# Altium PCB PCB.PcbDoc
Units mm, origin at the board's own origin, x right, y up, seen from the top; angles counter-clockwise.
Board outline 70 x 50 mm, 2 copper layers (Top Layer, Bottom Layer); 51 components, 33 nets, 179 pads, 25 vias.
Unrouted connection lines stored in the file: 2.
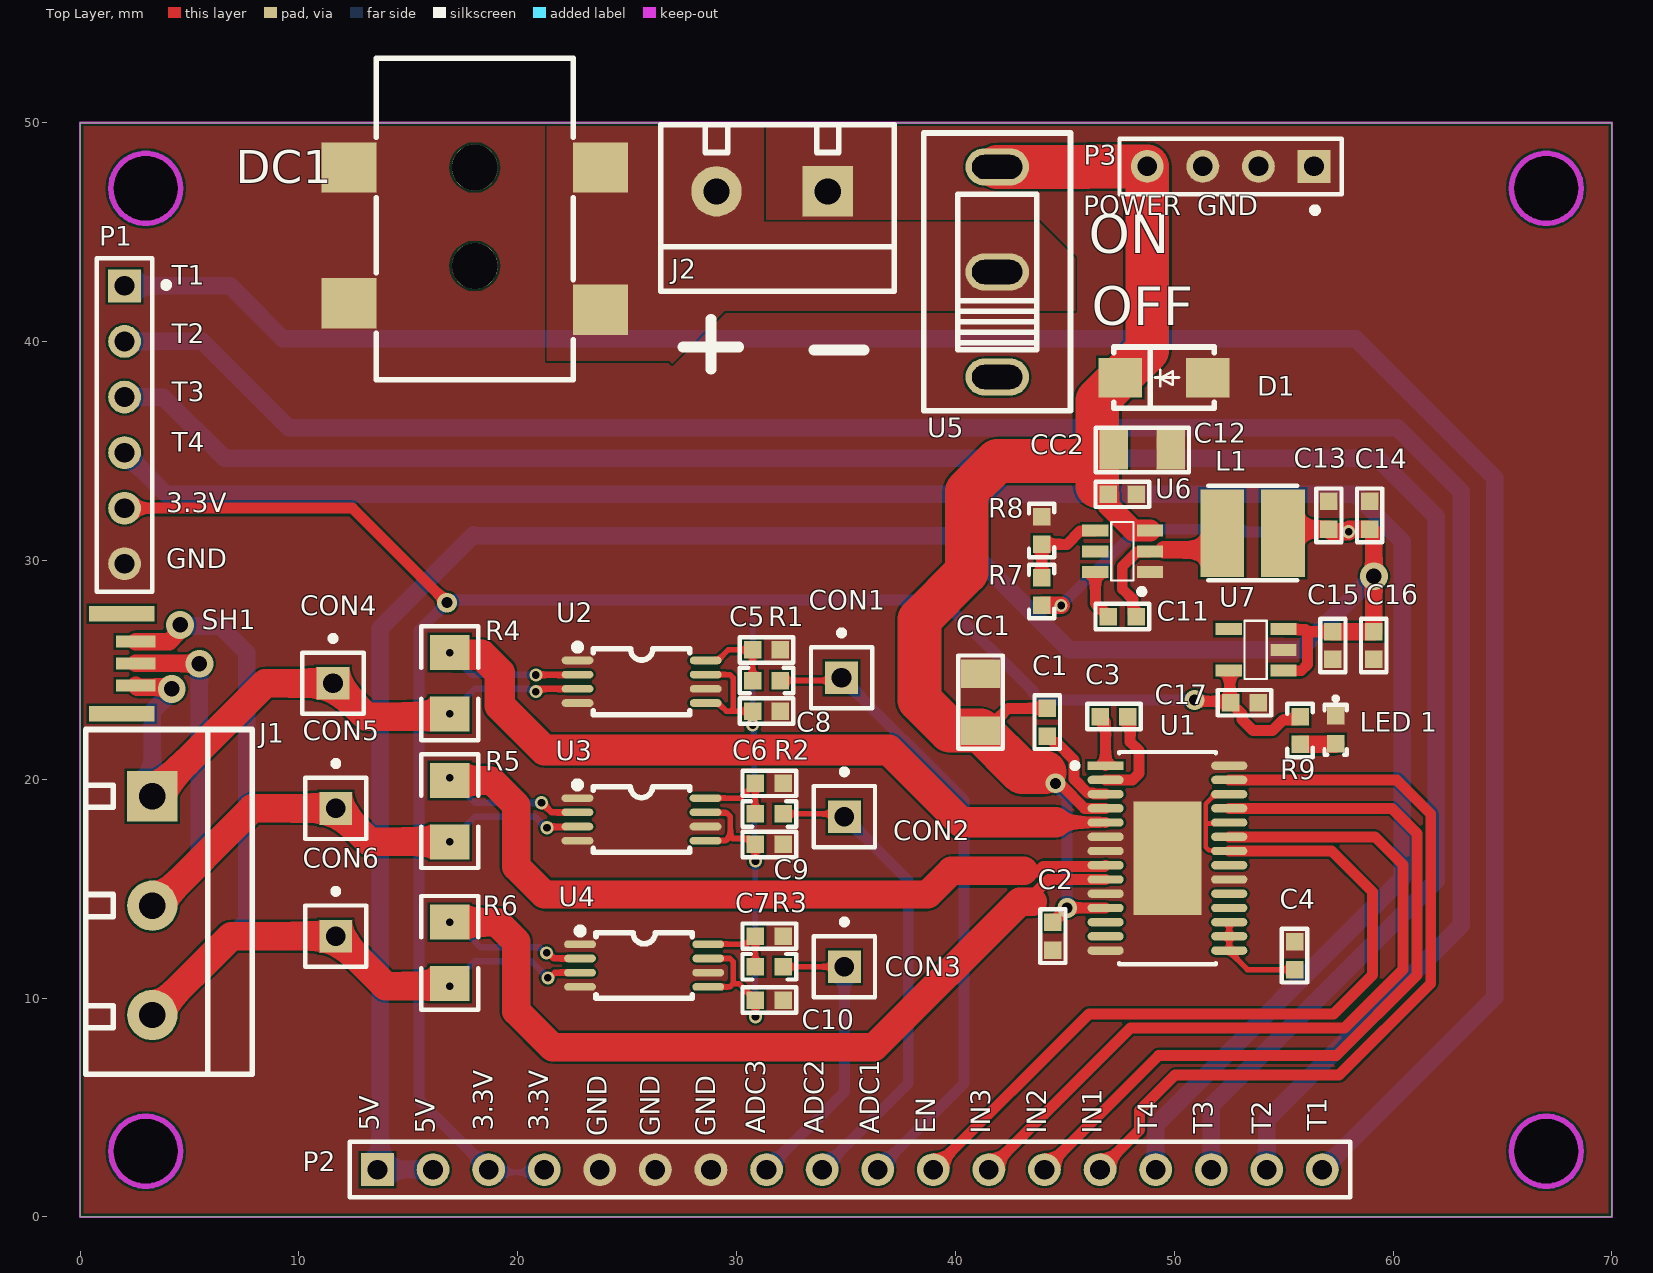
[diagram p0: Top Layer view]
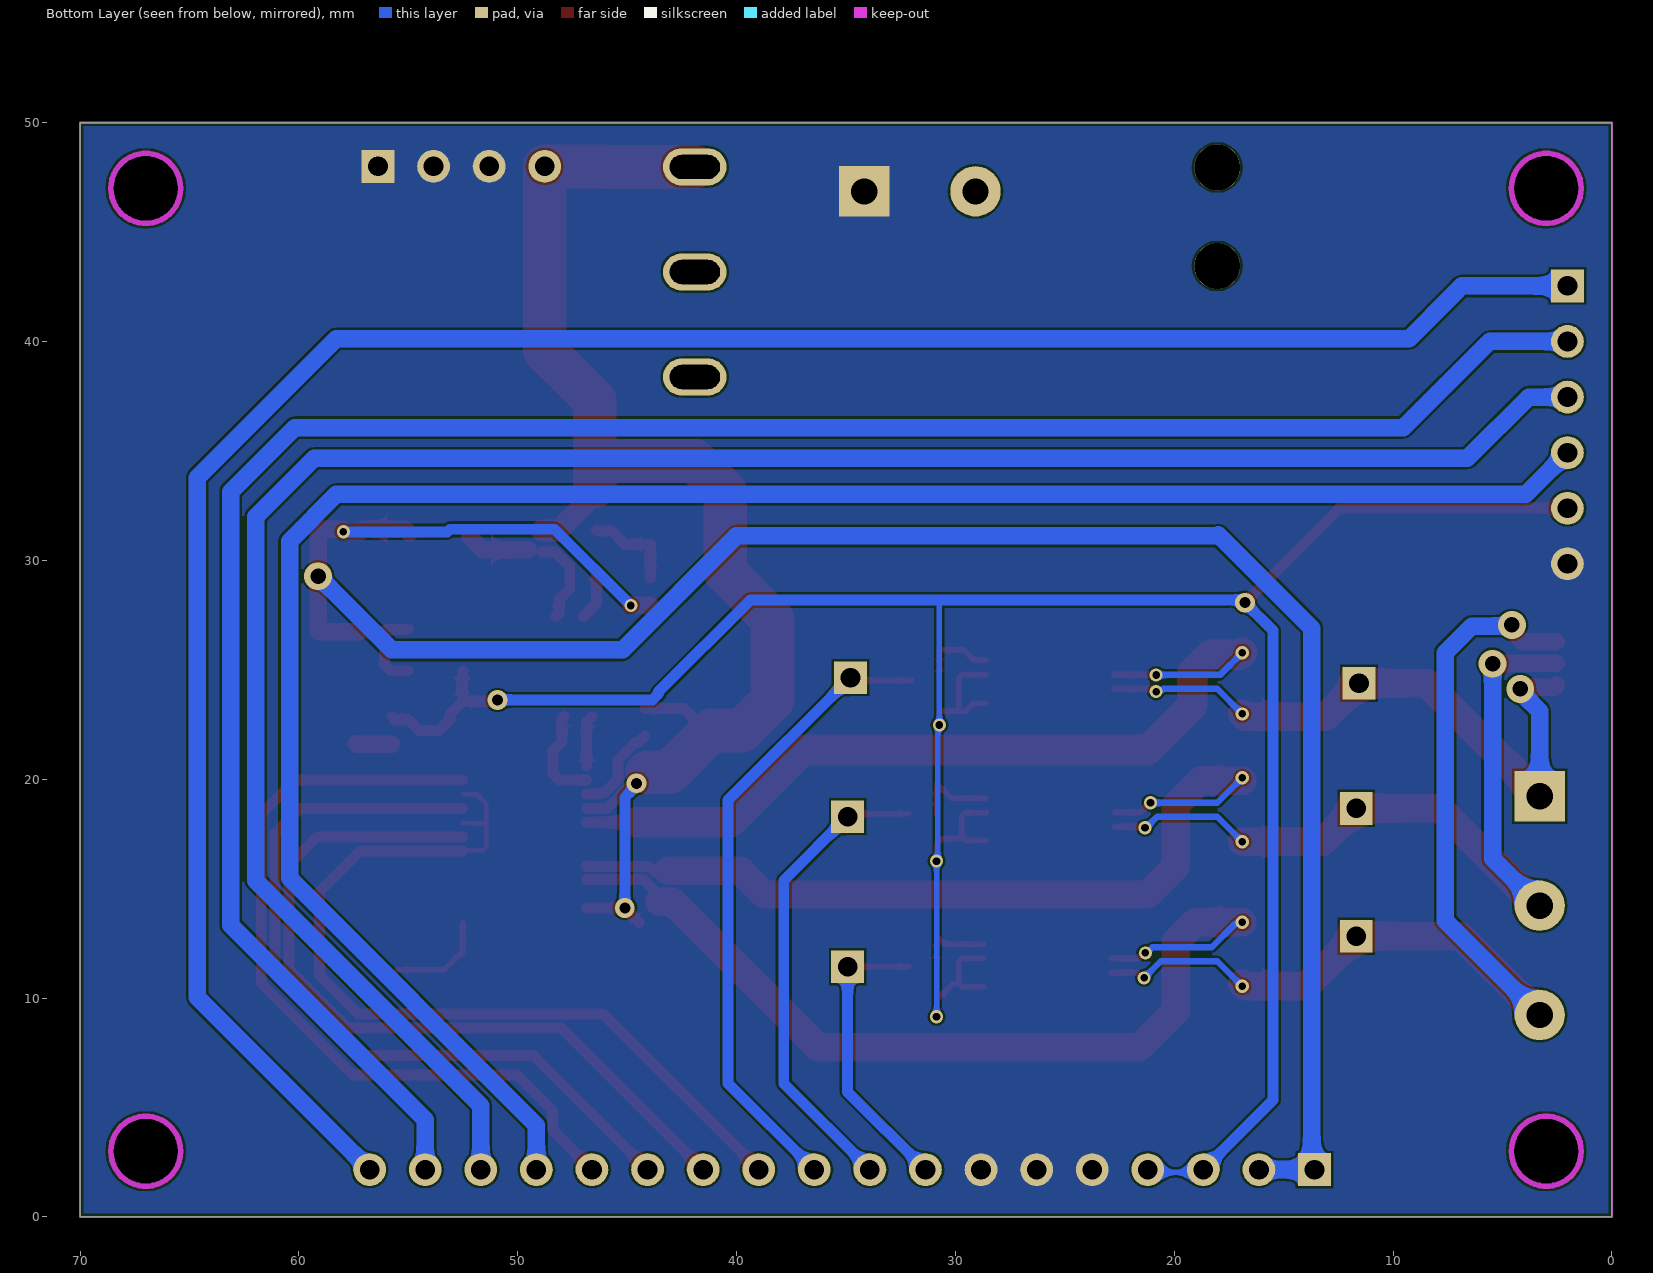
[diagram p1: Bottom Layer view, seen from below]

## Layer stack, top to bottom
Top Solder: solder mask 0.0102, Solder Resist, Dk 3.5
Top Layer: signal copper 0.0356
Dielectric 1: dielectric 0.32, FR-4, Dk 4.8
Bottom Layer: signal copper 0.0356
Bottom Solder: solder mask 0.0102, Solder Resist, Dk 3.5

## Board outline
0,0 0,50 70,50 70,0
cut-out: 65.4,3 ccw(c67,3) 67,1.4 ccw(c67,3) 68.6,3 ccw(c67,3) 67,4.6 ccw(c67,3)
cut-out: 65.4,47 ccw(c67,47) 67,45.4 ccw(c67,47) 68.6,47 ccw(c67,47) 67,48.6 ccw(c67,47)
cut-out: 3,45.4 cw(c3,47) 1.4,47 cw(c3,47) 3,48.6 cw(c3,47) 4.6,47 cw(c3,47)
cut-out: 1.4,3 ccw(c3,3) 3,1.4 ccw(c3,3) 4.6,3 ccw(c3,3) 3,4.6 ccw(c3,3)

## Design rules (kind name [scope] priority, off if disabled: settings)
Clearance [All] p1: gap=0.1 ignorepadtopadclearanceinfootprint=FALSE except(0: Arc-Hole Track-Hole SMDPad-Hole THPad-Hole Via-Hole Fill-Hole Poly-Hole Region-Hole Text-Hole; 0.102: Arc-Arc Arc-Track Arc-SMDPad Arc-THPad Track-Track Track-SMDPad Track-THPad SMDPad-SMDPad SMDPad-THPad THPad-THPad; 0.127: Arc-Via Track-Via SMDPad-Via SMDPad-Text THPad-Via Via-Via; 0.254: Arc-Text Track-Text THPad-Text Via-Text Fill-Text Poly-Text Region-Text Text-Text)
HoleSize [All] p1: absolutevalues=TRUE maxlimit=30 minlimit=0.025 maxpercent=80.000 minpercent=20.000
HoleToHoleClearance [All] p1: gap=0.152 allowstackedmicrovias=TRUE
MinimumSolderMaskSliver [All] p1: minsoldermaskwidth=0
PlaneClearance [All] p1: clearance=0.254
PlaneConnect [All] p1: planeconnectstyle=Direct reliefexpansion=0.508 reliefentries=4 reliefconductorwidth=0.254 reliefairgap=0.254
PolygonConnect [All] p1: connectstyle=Direct reliefconductorwidth=0.254 reliefentries=4 polygonreliefangle="90 Angle" airgapwidth=0.254
RoutingVias [All] p1: holewidth=0.711 width=1.27 viastyle="Through Hole" minholewidth=0.3 minwidth=0.5 maxholewidth=30 maxwidth=30
SilkToSilkClearance [All] p1: silktosilkclearance=0
SilkToSolderMaskClearance [IsPad] p1: minsilkscreentomaskgap=0 clearancetoexposedcopper=TRUE
SolderMaskExpansion [All] p1: expansion=0.102 istentingtop=FALSE
Width [All] p1: maxlimit=3 minlimit=0.1 preferedwidth=0.254
23 further rules are at their usual default settings.

## Classes and differential pairs
component class Sheet2-power: C11 C12 C13 C14 C15 C16 C17 CC2 D1 DC1 J2 L1 "LED 1" P3 R7 R8 R9 U5 U6 U7
component class Sheet1-driver: C1 C2 C3 C4 C5 C6 C7 C8 C9 C10 CC1 CON1 CON2 CON3 CON4 CON5 CON6 J1 P1 P2 R1 R2 R3 R4 R5 R6 SH1 U1 U2 U3 U4

## Components (designator, comment, footprint, x,y, rotation, side; value= is the part's Value field where it differs from the comment)
C1 "100nF" CC1608-0603 44.196,22.606 r90 top
C2 "100NF 50V" CC1608-0603 44.45,12.827 r270 top
C3 "0.01uF" CC1608-0603 47.244,22.86 r180 top
C4 "0.47UF" CC1608-0603 55.499,11.938 r90 top
C5 "2.2nF" CC1608-0603 31.369,25.908 r180 top
C6 "2.2nF" CC1608-0603 31.496,19.812 r180 top
C7 "2.2nF" CC1608-0603 31.496,12.827 r180 top
C8 "100nF" CC1608-0603 31.369,23.114 r180 top
C9 "100nF" CC1608-0603 31.496,17.018 r180 top
C10 "100nF" CC1608-0603 31.496,9.906 r180 top
C11 "100nF" CC1608-0603 47.625,27.432 r0 top
C12 "100NF 50V" CC1608-0603 47.625,33.02 r180 top
C13 "22uf" CC1608-0603 57.064,32.059 r270 top
C14 "22uf" CC1608-0603 58.933,32.059 r270 top
C15 "2.2uf" CC1608-0603 57.247,26.107 r90 top
C16 "100nF" CC1608-0603 59.116,26.107 r90 top
C17 "10uF" CC1608-0603 53.213,23.495 r0 top
CC1 "Cap Chip 1206" CC3216-1206 41.148,23.558 r270 top value="10UF 50V"
CC2 "Cap Chip 1206" CC3216-1206 48.578,35.052 r180 top value="10UF 50V"
CON1 "COAX-OUT" PIN1 34.798,24.638 r0 top
CON2 "COAX-OUT" PIN1 34.925,18.288 r0 top
CON3 "COAX-OUT" PIN1 34.925,11.43 r0 top
CON4 "COAX-OUT" PIN1 11.557,24.384 r0 top
CON5 "COAX-OUT" PIN1 11.684,18.669 r0 top
CON6 "COAX-OUT" PIN1 11.684,12.827 r0 top
D1 "SMBJ24A" "DO-214 AA" 49.53,38.354 r0 top
DC1 "DC-2.1" DC-IN-SMD_DC-050-25A 18.034,44.704 r0 top
J1 "HDR-1X3" KF301-5.0-3P 3.302,14.224 r270 top
J2 "HDR-1X3" KF301-5.0-2P 29.083,46.863 r180 top
L1 "15uH" Inductor-4018 53.594,31.242 r0 top
"LED 1" "LED 0603" "LED 0603" 57.377,22.266 r90 top
P1 "Header 6" HDR1X6 2.032,42.545 r270 top
P2 "Header 18" HDR1X18 13.589,2.159 r0 top
P3 "Header 4" HDR1X4 56.388,48.006 r180 top
R1 "168R" CR1608-0603 31.369,24.511 r180 top
R2 "168R" CR1608-0603 31.496,18.415 r180 top
R3 "168R" CR1608-0603 31.496,11.43 r180 top
R4 "10R" CR3216-1206 16.891,24.384 r90 top
R5 "10R" CR3216-1206 16.891,18.542 r90 top
R6 "10R" CR3216-1206 16.891,12.065 r90 top
R7 "100K 1%" CR1608-0603 43.942,28.575 r270 top
R8 "13.3K 1%" CR1608-0603 43.942,31.369 r270 top
R9 "2K" CR1608-0603 55.753,22.225 r270 top
SH1 "SH1.0-3P" SH1.0-3P 2.54,26.289 r270 top
U1 "DRV8313PWPR" HTSSOP-28 49.688,16.394 r0 top
U2 "INA240A1PWR" TSSOP-8 25.66,24.455 r270 top
U3 "INA240A1PWR" TSSOP-8 25.654,18.161 r270 top
U4 "INA240A1PWR" TSSOP-8 25.775,11.486 r270 top
U5 "HX SS12D10G4" SS12D10-G4 41.91,43.18 r90 top
U6 "TPS54202DDCR" SOT23-6 47.625,30.353 r90 top
U7 "SPX3819M5-L-3.3/TR" SOT23-5 54.991,26.863 r270 top

## Footprints (in the part's own frame and the unit in brackets; to place one, negate y for a bottom-side part, rotate by r counter-clockwise, add the part's x,y. Pads: shape width x height; smd on the part's side, far side on the other; paste and mask are expansions set on the pad)
CC1608-0603 [mm]
  rect 0.8x0.8 smd: 1(-0.635,0) 2(0.635,0)
  silkscreen extent -1.23,-0.58 1.23,0.58, body extent -0.8,-0.4 0.8,0.4, height 0.3
CC3216-1206 [mm]
  rect 1.3x1.8 smd: 1(-1.27,0) 2(1.333,0)
  silkscreen extent -2.1,-1.02 2.16,1.02, body extent -1.59,-0.85 1.61,0.85, height 1.76
CR1608-0603 [mm]
  rect 0.8x0.8 smd: 1(-0.635,0) 2(0.635,0)
  silkscreen extent -1.23,-0.58 1.23,0.58, body extent -0.8,-0.4 0.8,0.4, height 0.45
CR3216-1206 [mm]
  rect 1.6x1.8 smd: 1(-1.4,0) 2(1.4,0)
  silkscreen extent -2.6,-1.3 2.6,1.3, body extent -1.6,-0.8 1.6,0.8, height 0.6
DC-IN-SMD_DC-050-25A [mm]
  rect 2.5x2.3 smd: 1(5.75,-3.25) 1(5.75,3.25) 2(-5.75,3.25) 3(-5.75,-2.95)
  round 2.1 hole 2.1 unplated: ""(0,-1.25) ""(0,3.25)
  silkscreen extent -4.5,-6.45 4.5,8.25, body extent -6.28,-6.57 6.28,8.13, height 10.94
"DO-214 AA" [mm] "SMB"
  rect 2x1.8 smd: 1(-2,0) 2(2,0)
  silkscreen extent -2.3,-1.4 2.3,1.4, body extent -2.83,-1.8 2.57,1.8, height 2.4
HDR1X4 [mm] "Connector; Header; 4 Position"
  rect 1.5x1.5 hole 0.9: 1(0,0)
  round 1.5 hole 0.9: 2(2.54,0) 3(5.08,0) 4(7.62,0)
  silkscreen extent -1.27,-1.27 8.89,2.14, body extent -1.27,-1.27 8.89,1.27, height 8.54
HDR1X6 [mm] "Connector; Header; 6 Position"
  rect 1.5x1.5 hole 0.9: 1(0,0)
  round 1.5 hole 0.9: 2(2.54,0) 3(5.08,0) 4(7.62,0) 5(10.16,0) 6(12.7,0)
  silkscreen extent -1.27,-1.27 13.97,2.04, body extent -1.27,-1.27 13.97,1.27, height 8.54
HDR1X18 [mm] "Connector; Header; 18 Position"
  rect 1.5x1.5 hole 0.9: 1(0,0)
  round 1.5 hole 0.9: 2(2.54,0) 3(5.08,0) 4(7.62,0) 5(10.16,0) 6(12.7,0) 7(15.24,0) 8(17.78,0) 9(20.32,0) 10(22.86,0) 11(25.4,0) 12(27.94,0) 13(30.48,0) 14(33.02,0) 15(35.56,0) 16(38.1,0) 17(40.64,0) 18(43.18,0)
  silkscreen extent -1.27,-1.27 44.45,1.27
HTSSOP-28 [mm]
  rect 1.655x0.381 smd paste+0 mask+0: 1(-2.825,4.225)
  rrect100% 1.655x0.381 smd paste+0 mask+0: 2(-2.825,3.575) 3(-2.825,2.925) 4(-2.825,2.275) 5(-2.825,1.625) 6(-2.825,0.975) 7(-2.825,0.325) 8(-2.825,-0.325) 9(-2.825,-0.975) 10(-2.825,-1.625) 11(-2.825,-2.275) 12(-2.825,-2.925) 13(-2.825,-3.575) 14(-2.825,-4.225) 15(2.825,-4.225) 16(2.825,-3.575) 17(2.825,-2.925) 18(2.825,-2.275) 19(2.825,-1.625) 20(2.825,-0.975) 21(2.825,-0.325) 22(2.825,0.325) 23(2.825,0.975) 24(2.825,1.625) 25(2.825,2.275) 26(2.825,2.925) 27(2.825,3.575) 28(2.825,4.225)
  rect 3.1x5.18 smd paste-1000 mask+0: 29(0,0)
  silkscreen extent -4.35,-4.85 2.2,4.85, body extent -3.9,-5.1 3.9,5.1, height 0.25
Inductor-4018 [mm]
  rect 2x4 smd paste+0 mask+0.051: 1(-1.397,0) 2(1.373,0)
  silkscreen extent -2.03,-2.16 2.03,2.16, body extent -2,-2 2,2, height 1.8
KF301-5.0-2P [mm] "可拼接端子/6A"
  rect 2.3x2.3 hole 1.2: 1(-5.08,0)
  round 2.3 hole 1.2: 2(0,0)
  silkscreen extent -8.13,-3.05 2.54,4.57, body extent -7.95,-3 2.55,4.6, height 10.05
KF301-5.0-3P [mm] "可拼接端子/6A"
  rect 2.3x2.3 hole 1.2: 1(-5,0)
  round 2.3 hole 1.2: 2(0,0) 3(5,0)
  silkscreen extent -8.05,-3.05 7.7,4.57, body extent -7.87,-3 7.63,4.6, height 10.05
"LED 0603" [mm]
  rect 0.8x0.8 smd: 1(-0.635,0) 2(0.635,0)
  silkscreen extent -1.14,-0.51 1.48,0.51, body extent -0.8,-0.4 0.8,0.4, height 0.6
PIN1 [mm] "Connector; Coax-F"
  rect 1.5x1.5 hole 0.9: 1(0,0)
  silkscreen extent -1.4,-1.4 1.4,2.17, body extent -1.27,-1.27 1.27,1.27, height 8.54
SH1.0-3P [mm]
  rect 0.7x3 smd: 0(-1.27,-0.635) 0(3.3,-0.635)
  rect 0.55x1.8 smd: 1(0,0) 2(1,0) 3(2,0)
  body extent -1.49,-2.29 3.56,0.55, height 3
SOT23-5 [mm] "适用于MIC5205"
  rect 0.55x1.2 smd: 1(1.905,0) 2(0.955,0) 3(0.005,0) 4(0.005,-2.5) 5(1.905,-2.5)
  silkscreen extent -0.38,-1.78 2.29,-0.76, body extent -0.6,-2.82 2.5,0.38, height 1.45
SOT23-6 [mm]
  rect 0.55x1.2 smd: 1(-0.889,-1.27) 2(0.061,-1.27) 3(1.011,-1.27) 4(1.011,1.23) 5(0.061,1.23) 6(-0.889,1.23)
  silkscreen extent -1.9,-1.02 1.4,0.51, body extent -1.39,-1.4 1.51,1.4, height 1.45
SS12D10-G4 [mm]
  oval 1.7x2.9 hole 1.1 slot 2.3 at 90 deg: 1(-4.8,0) 2(0,0) 3(4.8,0)
  silkscreen extent -6.35,-3.35 6.35,3.35, body extent -6.32,-3.25 6.3,3.25, height 9.3
TSSOP-8 [mm]
  oval 0.353x1.454 smd: 1(-0.975,-2.927) 2(-0.325,-2.927) 3(0.325,-2.927) 4(0.975,-2.927) 5(0.975,2.927) 6(0.325,2.927) 7(-0.325,2.927) 8(-0.975,2.927)
  silkscreen extent -1.73,-3.08 1.5,2.2, body extent -1.43,-3.17 1.57,3.11, height 1.09

## Part data
C1 C2 C3 C4 C5 C6 C7 C8 C9 C10 C11 C12 C13 C14 C15 C16: library part "Cap Chip 0603", "0603封装的电容", Published=8-Jun-2000, Publisher="Altium Limited", Revision="July-2002: Re-released for DXP Platform."
C17: library part "Chip capacitor", "贴片电容"
CC1 CC2: "Polarized Capacitor (Radial)", Published=8-Jun-2000, Publisher="Altium Limited", Revision="July-2002: Re-released for DXP Platform."
CON1 CON2 CON3 CON4 CON5 CON6: "Coax-M Connector", Publisher="Altium Limited", Revision="17-Jul-2002: Re-released for DXP Platform."
D1: library part SMBJ18A, "TVS稳压二极管"
DC1: library part DC-050, "DC贴片插座", BOM_JLCPCB Part Class="Extended Part", BOM_Manufacturer=韩国韩荣, BOM_Manufacturer Part=DC-050-25A, BOM_Supplier=LCSC, BOM_Supplier Part=C707275, Contributor=LCSC, spicePre=D, spiceSymbolName=DC-050-25A
J1: library part "KF301 3P", "3P拧螺丝插件", BOM名称=3P接插件, 学习资源=https://shop463601444.taobao.com, 版权归属="封装库来自淘宝 ID：黄晶宝石"
J2: library part "KF301 2P", "2P拧螺丝接口", BOM名称=3P接插件, 学习资源=https://shop463601444.taobao.com, 版权归属="封装库来自淘宝 ID：黄晶宝石"
L1: library part Inductor-4018, "贴片电感 1206封装"
P1: "Header, 6-Pin", LatestRevisionDate=17-Jul-2002, LatestRevisionNote="Re-released for DXP Platform.", Publisher="Altium Limited"
P2: "Header, 18-Pin", LatestRevisionDate=17-Jul-2002, LatestRevisionNote="Re-released for DXP Platform.", Publisher="Altium Limited"
P3: "Header, 4-Pin", LatestRevisionDate=17-Jul-2002, LatestRevisionNote="Re-released for DXP Platform.", Publisher="Altium Limited"
R1 R2 R3 R7 R8 R9: library part "Resistor Chip 0603", "0603封装电阻", Published=8-Jun-2000, Publisher="Altium Limited", Revision="July-2002: Re-released for DXP Platform."
R4 R5 R6: library part "Resistor Chip 1206", "1206封装电阻", Published=8-Jun-2000, Publisher="Altium Limited", Revision="July-2002: Re-released for DXP Platform."
SH1: "间距为1mm的端子"
U1: library part DRV8313, "独立控制的半 H 桥驱动器,主要用于驱动一个三项无刷电机IC MOTOR DRIVER 8V-60V 28HTSSOP", Case/Package=HTSSOP, Max Operating Temperature=125°C, Max Supply Voltage=60V, Min Operating Temperature=-40°C, Min Supply Voltage=8V, Output Current=1.75A, Package Quantity=2000, Interface=Parallel, Lead Free="Lead Free", Logic Function="AND GATE", Mount="Surface Mount", Number of Outputs=1, Number of Pins=28, Packaging="Tape and Reel", Series=-
U2 U3 U4: "超精密电流检测放大器"
U5: library part SS12D10G4, BOM_JLCPCB Part Class="Extended Part", BOM_Manufacturer=hanxia(韩下), BOM_Manufacturer Part="HX SS12D10G4", BOM_Supplier=LCSC, BOM_Supplier Part=C5149841, Contributor=lcsc, link=https://atta.szlcsc.com/upload/public/pdf/source/20220907/2020D7183ED16DD6E2B9F5A13FB144CF.pdf, spicePre=U, spiceSymbolName="HX SS12D10G4"
U6: "同步降压转换器芯片 500Khz 4.2~28V输入，2A输出"
U7: "LDO 3.3V , SOT-23-5 500ma"

## Via types
v1: diameter 0.6, hole 0.35, Top Layer to Bottom Layer, tented both sides, 17 vias
v2: diameter 0.9, hole 0.5, Top Layer to Bottom Layer, tented both sides, 4 vias
v3: diameter 1.27, hole 0.711, Top Layer to Bottom Layer, 4 vias

## Nets (pads, with @x,y where several pads share a name; then routed paths per layer and width w, separated by ;. In a path a pad name is that pad's centre, name@x,y a point inside that pad or via, vN(x,y) a via of type N, cw(c..) or ccw(c..) an arc to the next point about the centre after c; other vN are vias at no path point)
3.3V: C8.2 C9.2 C10.2 C17.1 P1.5 P2.3 P2.4 R9.1 U2.5 U2.7 U3.5 U3.7 U4.5 U4.7 U7.5 | length 126.2
  Top Layer w0.254: U3.5 28.6,17.205 29.524,17.205 29.718,17.399 ; U3.7 28.6,18.467 29.539,18.467 29.718,18.288 29.718,17.399 ; U2.5 29.164,23.48 29.53,23.114 29.718,23.114 ; U2.7 29.696,24.78 29.845,24.631 29.845,23.241 29.718,23.114 ; U4.5 29.696,10.511 29.845,10.66 ; U4.7 29.696,11.811 29.845,11.662 29.845,10.66 ; v1(30.734,22.479) C8.2 29.718,23.114 ; v1(30.861,9.144) C10.2 30.107,10.66 29.845,10.66 ; v1(30.861,16.256) C9.2 30.588,17.291 29.826,17.291 29.718,17.399
  Top Layer w0.5: P1.5 12.446,32.385 v2(16.764,28.067) ; v2(50.927,23.622) 50.99,23.558 52.514,23.558 C17.1@52.534,23.539 ; U7.5 52.509,24.958 52.534,24.933 C17.1@52.534,23.539 ; R9.1 55.603,22.71 54.968,22.71 54.483,22.225 53.594,22.225 53.096,22.723 53.096,22.977 C17.1 C17.1@52.534,23.539
  Bottom Layer w0.254: P2.3 18.796,2.032 21.082,2.032 P2.4 ; v1@30.797,16.256 30.797,22.415 v1(30.734,22.479) 30.734,28.067 30.861,28.194 ; v1(30.861,9.144) v1(30.861,16.256)
  Bottom Layer w0.5: P2.3 15.494,5.334 15.494,26.797 v2(16.764,28.067) 16.891,28.194 30.861,28.194 39.37,28.194 43.561,24.003 43.561,23.915 43.854,23.622 v2(50.927,23.622)
5V: C13.2 C14.2 C15.2 C16.2 L1.2 P2.1 P2.2 R7.2 U7.1 U7.3 | length 109.3
  Top Layer w0.5: U7.1 55.805,24.958 56.097,25.251 56.097,26.742 ; U7.3 55.016,26.833 56.006,26.833 56.097,26.742 ; C15.2 56.097,26.742
  Top Layer w0.8: R7.2 v1(44.831,27.94) ; L1.2 55.149,31.424 C13.2 57.182,31.306 v1(57.97,31.306) ; C15.2 C16.2 v3@59.116,29.277 ; v1@57.998,31.424 C14.2 59.122,31.235 v3(59.122,29.277)
  Bottom Layer w0.5: v1(44.831,27.94) 48.315,31.424 53.103,31.424 53.221,31.306 v1(57.97,31.306)
  Bottom Layer w0.8: P2.2 P2.1 13.716,2.286 13.716,26.896 17.984,31.165 18.034,31.115 40.005,31.115 45.212,25.908 55.753,25.908 v3(59.122,29.277)
ADC1: CON1.1 P2.10 R1.1 | length 29.3
  Top Layer w0.254: R1.1 34.671,24.511 CON1.1
  Bottom Layer w0.5: CON1.1 40.386,19.05 40.386,6.096 P2.10
ADC2: CON2.1 P2.9 R2.1 | length 21.8
  Top Layer w0.254: R2.1 34.798,18.415 CON2.1
  Bottom Layer w0.5: P2.9 37.846,6.096 37.846,15.367 CON2.1
ADC3: CON3.1 P2.8 R3.1 | length 13.5
  Top Layer w0.254: R3.1 CON3.1
  Bottom Layer w0.5: P2.8 34.925,5.715 CON3.1
DRV_EN: P2.11 U1.22 U1.24 U1.26 | length 40.4
  Top Layer w0.2: U1.22 52.479,16.754 51.572,16.754 51.44,16.886 51.44,17.884 ; U1.24 52.479,17.984 51.54,17.984 51.44,17.884 ; U1.26 51.876,19.319 51.44,18.883 51.44,17.884
  Top Layer w0.5: P2.11 46.101,9.271 57.277,9.271 59.055,11.049 59.055,14.859 57.195,16.719 U1.22
GND: "LED 1.2" C2.2 C4.2 C5.1 C6.1 C7.1 C8.1 C9.1 C10.1 C12.1 C13.1 C14.1 C15.1 C16.1 C17.2 CC1.1 CC2.1 D1.2 DC1.2 DC1.3 J2.1 P1.6 P2.5 P2.6 P2.7 P3.1 P3.2 P3.3 R8.1 U1.6 U1.7 U1.10 U1.14 U1.20 U1.28 U1.29 U2.1 U2.4 U2.6 U3.1 U3.4 U3.6 U4.1 U4.4 U4.6 U6.1 U7.2
IN1: P2.14 U1.27 | length 36.8
  Top Layer w0.5: P2.14 48.419,3.969 48.419,4.858 50.038,6.477 57.531,6.477 61.722,10.668 61.722,18.415 60.168,19.969 U1.27
IN2: P2.13 U1.25 | length 36.2
  Top Layer w0.5: P2.13 49.276,7.366 57.404,7.366 61.087,11.049 61.087,17.526 59.944,18.669 U1.25
IN3: P2.12 U1.23 | length 36
  Top Layer w0.5: P2.12 48.006,8.636 57.785,8.636 60.452,11.303 60.452,16.09 59.173,17.369 U1.23
NetC1_1: C1.1 U1.3 | length 4.3
  Top Layer w0.5: C1.1 44.495,21.672 44.629,21.672 45.421,20.88 45.421,20.008 46.05,19.379 46.285,19.379 46.345,19.319 U1.3
NetC3_1: C3.1 U1.2 | length 4.5
  Top Layer w0.5: U1.2 48.094,19.969 48.387,20.262 48.387,21.307 47.984,21.71 47.984,22.755 C3.1
NetC3_2: C3.2 U1.1 | length 2.3
  Top Layer w0.5: C3.2 46.863,22.606 U1.1
NetC5_2: C5.2 R1.2 U2.8 | length 3.7
  Top Layer w0.254: U2.8 29.137,25.43 29.615,25.908 C5.2 R1.2
NetC6_2: C6.2 R2.2 U3.8 | length 4
  Top Layer w0.254: U3.8 30.185,19.136 C6.2 R2.2
NetC7_2: C7.2 R3.2 U4.8 | length 3.7
  Top Layer w0.254: U4.8 30.495,12.461 C7.2 R3.2
NetC11_1: C11.1 U6.6 | length 2.3
  Top Layer w0.5: U6.6 46.395,28.027 C11.1
NetC11_2: C11.2 L1.1 U6.2 | length 7.2
  Top Layer w0.5: C11.2 48.11,27.582 48.11,28.217 47.625,28.702 47.625,29.718 48.296,30.389 48.87,30.389 U6.2
  Top Layer w0.8: 49.53,30.48 51.597,30.48 52.197,31.08 L1.1
NetDC1_1: DC1.1 J2.2 U5.2
"NetLED 1_1": "LED 1.1" R9.2 | length 1.6
  Top Layer w0.8: R9.2 57.336,21.59 57.377,21.631
NetR7_1: R7.1 R8.2 U6.4 | length 4.2
  Top Layer w0.5: R7.1 R8.2 45.092,30.734 45.697,31.339 46.37,31.339 U6.4
OUT1: CON4.1 J1.1 R4.1 SH1.3 U2.3 | length 29.8
  Top Layer w0.3: v1(20.828,24.003) 20.909,24.003 21.036,24.13 U2.3
  Top Layer w0.8: SH1.3 2.621,24.208 4.11,24.208 v3(4.191,24.127)
  Top Layer w1.3: J1.1 8.462,24.384 CON4.1 13.081,22.86 16.767,22.86 R4.1
  Bottom Layer w0.3: v1(16.891,22.987) 18.034,24.13 20.502,24.13 20.572,24.06 20.771,24.06 v1(20.828,24.003)
  Bottom Layer w0.8: J1.1 3.302,23.111 4.191,24 v3(4.191,24.127)
OUT1_CS: R4.2 U1.5 U2.2 | length 40.3
  Top Layer w0.3: v1(20.828,24.765) 20.835,24.772 22.726,24.772 U2.2
  Top Layer w0.5: 44.577,18.034 46.848,18.034 U1.5
  Top Layer w1.4: R4.2 16.991,25.684 18.357,25.684 19.177,24.864 19.177,23.368 21.209,21.336 36.957,21.336 40.259,18.034 44.577,18.034
  Bottom Layer w0.3: v1(16.891,25.781) 17.907,24.765 v1(20.828,24.765)
OUT2: CON5.1 J1.2 R5.1 SH1.2 U3.3 | length 37.5
  Top Layer w0.3: v1(21.336,17.78) 21.382,17.826 22.717,17.826 U3.3
  Top Layer w0.8: SH1.2 5.445,25.289 v3@5.461,25.273
  Top Layer w1.3: J1.2 3.429,14.224 7.874,18.669 CON5.1 13.208,17.145 16.888,17.145 R5.1
  Bottom Layer w0.3: v1(16.891,17.145) 18.034,18.288 20.783,18.288 21.291,17.78 v1(21.336,17.78)
  Bottom Layer w0.8: J1.2 5.453,16.375 v3(5.453,25.281)
OUT2_CS: R5.2 U1.8 U3.2 | length 40.9
  Top Layer w0.3: v1(21.082,18.923) 21.113,18.923 21.55,18.486 U3.2
  Top Layer w0.5: 43.12,15.808 43.18,15.748 43.731,15.748 44.003,16.021 46.815,16.021 U1.8
  Top Layer w1.3: R5.2 16.894,19.939 18.796,19.939 19.939,18.796 19.939,16.002 21.209,14.732 38.735,14.732 39.811,15.808 43.12,15.808
  Bottom Layer w0.3: v1(16.891,20.066) 18.034,18.923 v1(21.082,18.923)
OUT3: CON6.1 J1.3 R6.1 SH1.1 U4.3 | length 46.9
  Top Layer w0.3: v1(21.377,10.922) 21.452,10.922 21.691,11.161 U4.3
  Top Layer w0.8: SH1.1 4.064,26.289 v3@4.445,26.67
  Top Layer w1.3: J1.3 6.905,12.827 CON6.1 13.97,10.541 16.767,10.541 R6.1
  Bottom Layer w0.3: v1(16.891,10.541) 18.034,11.684 20.615,11.684 v1(21.377,10.922)
  Bottom Layer w0.8: J1.3 7.62,13.542 7.62,25.781 6.407,26.994 4.629,26.994 v3(4.572,27.051)
OUT3_CS: R6.2 U1.9 U4.2 | length 44.2
  Top Layer w0.3: v1(21.32,12.065) 21.401,12.065 21.655,11.811 U4.2
  Top Layer w0.5: 43.532,14.406 43.561,14.436 43.561,14.727 44.253,15.419 U1.9
  Top Layer w1.3: R6.2 19.047,13.465 19.431,13.081 19.939,12.573 19.939,9.398 21.59,7.747 36.28,7.747 42.939,14.406 43.532,14.406
  Bottom Layer w0.3: v1(16.891,13.462) 16.948,13.405 17.202,13.405 18.288,12.319 20.995,12.319 21.249,12.065 v1(21.32,12.065)
POWER: C1.2 C2.1 C12.2 CC1.2 CC2.2 D1.1 P3.4 U1.4 U1.11 U5.3 U6.3 | length 64.9
  Top Layer w0.5: CC1.2 41.398,22.225 42.414,23.241 C1.2 ; 44.069,20.32 44.654,19.735 44.842,19.735 45.908,18.669 U1.4 ; C2.1 v2(45.107,14.119) U1.11
  Top Layer w1: C12.2 46.99,32.512 48.133,31.369 48.89,31.369 U6.3
  Top Layer w2: U5.3 46,47.98 46.026,48.006 P3.4 48.768,39.592 D1.1 46.482,37.306 46.482,34.544 ; 44.069,20.32 43.053,20.32 CC1.2 39.751,22.225 38.354,23.622 38.354,27.305 40.513,29.464 40.513,33.147 41.91,34.544 46.482,34.544 ; 46.482,33.401 46.482,34.544
  Bottom Layer w0.5: v2(44.577,19.812) 44.577,19.704 45.107,19.174 v2(45.107,14.119)
T1: P1.1 P2.18 | length 101.1
  Bottom Layer w0.8: P1.1 6.858,42.545 7.239,42.164 9.271,40.132 58.293,40.132 64.643,33.782 64.643,10.033 P2.18
T2: P1.2 P2.17 | length 98.6
  Bottom Layer w0.8: P1.2 5.588,40.005 9.525,36.068 60.198,36.068 63.119,33.147 63.119,13.335 54.229,4.445 P2.17
T3: P1.3 P2.16 | length 96.3
  Bottom Layer w0.8: P1.3 3.81,37.465 6.604,34.671 59.309,34.671 61.976,32.004 61.976,15.367 51.689,5.08 P2.16
T4: P1.4 P2.15 | length 93.5
  Bottom Layer w0.8: P1.4 3.937,33.02 58.288,33.02 60.427,30.881 60.427,15.469 49.149,4.191 P2.15
V3P3: C4.1 U1.15 U1.16 U1.17 | length 4.7
  Top Layer w0.254: U1.17 U1.16 U1.15 52.514,12.129 53.34,11.303 C4.1
pads on no net: DC1. SH1.0 U1.12 U1.13 U1.18 U1.19 U1.21 U5.1 U6.5 U7.4

## Polygon pours and split planes (outlines as drawn)
GND on Top Layer "GND_L01_P002" (solid, pour order 2): 0,0 0,50 70,50 70,0
NetDC1_1 on Top Layer "NETDC1_1_L01_P000" (solid, pour order 0): 31.242,50.038 31.242,45.466 43.815,45.466 45.466,43.815 45.466,41.402 29.464,41.402 27.051,38.989 26.924,39.116 21.336,39.116 21.336,50.038
GND on Bottom Layer "GND_L02_P003" (solid, pour order 3): 0,0 0,50 70,50 70,0

## Keep-outs
Keep-Out Layer:
  circle w0.254: c67,3 r1.6
  circle w0.254: c67,47 r1.6
  circle w0.254: c3,47 r1.6
  circle w0.254: c3,3 r1.6
  lines w0.1: 0,0 0,50 70,50 70,0 0,0

## Silkscreen, mask and mechanical layers (free items; w line width, h text height)
Top Overlay:
  lines w0.5: 27.559,39.751 30.099,39.751 ; 28.829,38.735 28.829,41.021 ; 33.528,39.624 35.814,39.624
  text "POWER" at 45.847,45.483 h1.52
  text "GND" at 51.054,45.483 h1.52
  text "ON" at 46.101,43.467 h3
  text "T1" at 4.191,42.291 h1.52
  text "OFF" at 46.228,40.165 h3
  text "T2" at 4.191,39.624 h1.52
  text "T3" at 4.191,36.974 h1.52
  text "T4" at 4.191,34.671 h1.52
  text "3.3V" at 3.937,31.894 h1.52
  text "GND" at 3.937,29.354 h1.52
  text "5V" at 13.953,3.937 h1.52 r90
  text "3.3V" at 19.16,3.937 h1.52 r90
  text "3.3V" at 21.7,3.937 h1.52 r90
  text "T1" at 57.277,3.937 h1.52 r90
  text "5V" at 16.493,3.81 h1.52 r90
  text "ADC3" at 31.606,3.81 h1.52 r90
  text "ADC2" at 34.273,3.81 h1.52 r90
  text "ADC1" at 36.813,3.81 h1.52 r90
  text "EN" at 39.37,3.81 h1.52 r90
  text "IN3" at 41.893,3.81 h1.52 r90
  text "IN2" at 44.45,3.81 h1.52 r90
  text "IN1" at 46.99,3.81 h1.52 r90
  text "T4" at 49.53,3.81 h1.52 r90
  text "T3" at 52.053,3.81 h1.52 r90
  text "T2" at 54.737,3.81 h1.52 r90
  text "GND" at 24.367,3.683 h1.52 r90
  text "GND" at 26.78,3.683 h1.52 r90
  text "GND" at 29.32,3.683 h1.52 r90